# Altium PCB PCB1.PcbDoc
Units mil, origin at the board's own origin, x right, y up, seen from the top; angles counter-clockwise.
Board outline 3670 x 4430 mil, 2 copper layers (Top Layer, Bottom Layer); 37 components, 41 nets, 180 pads, 33 vias.
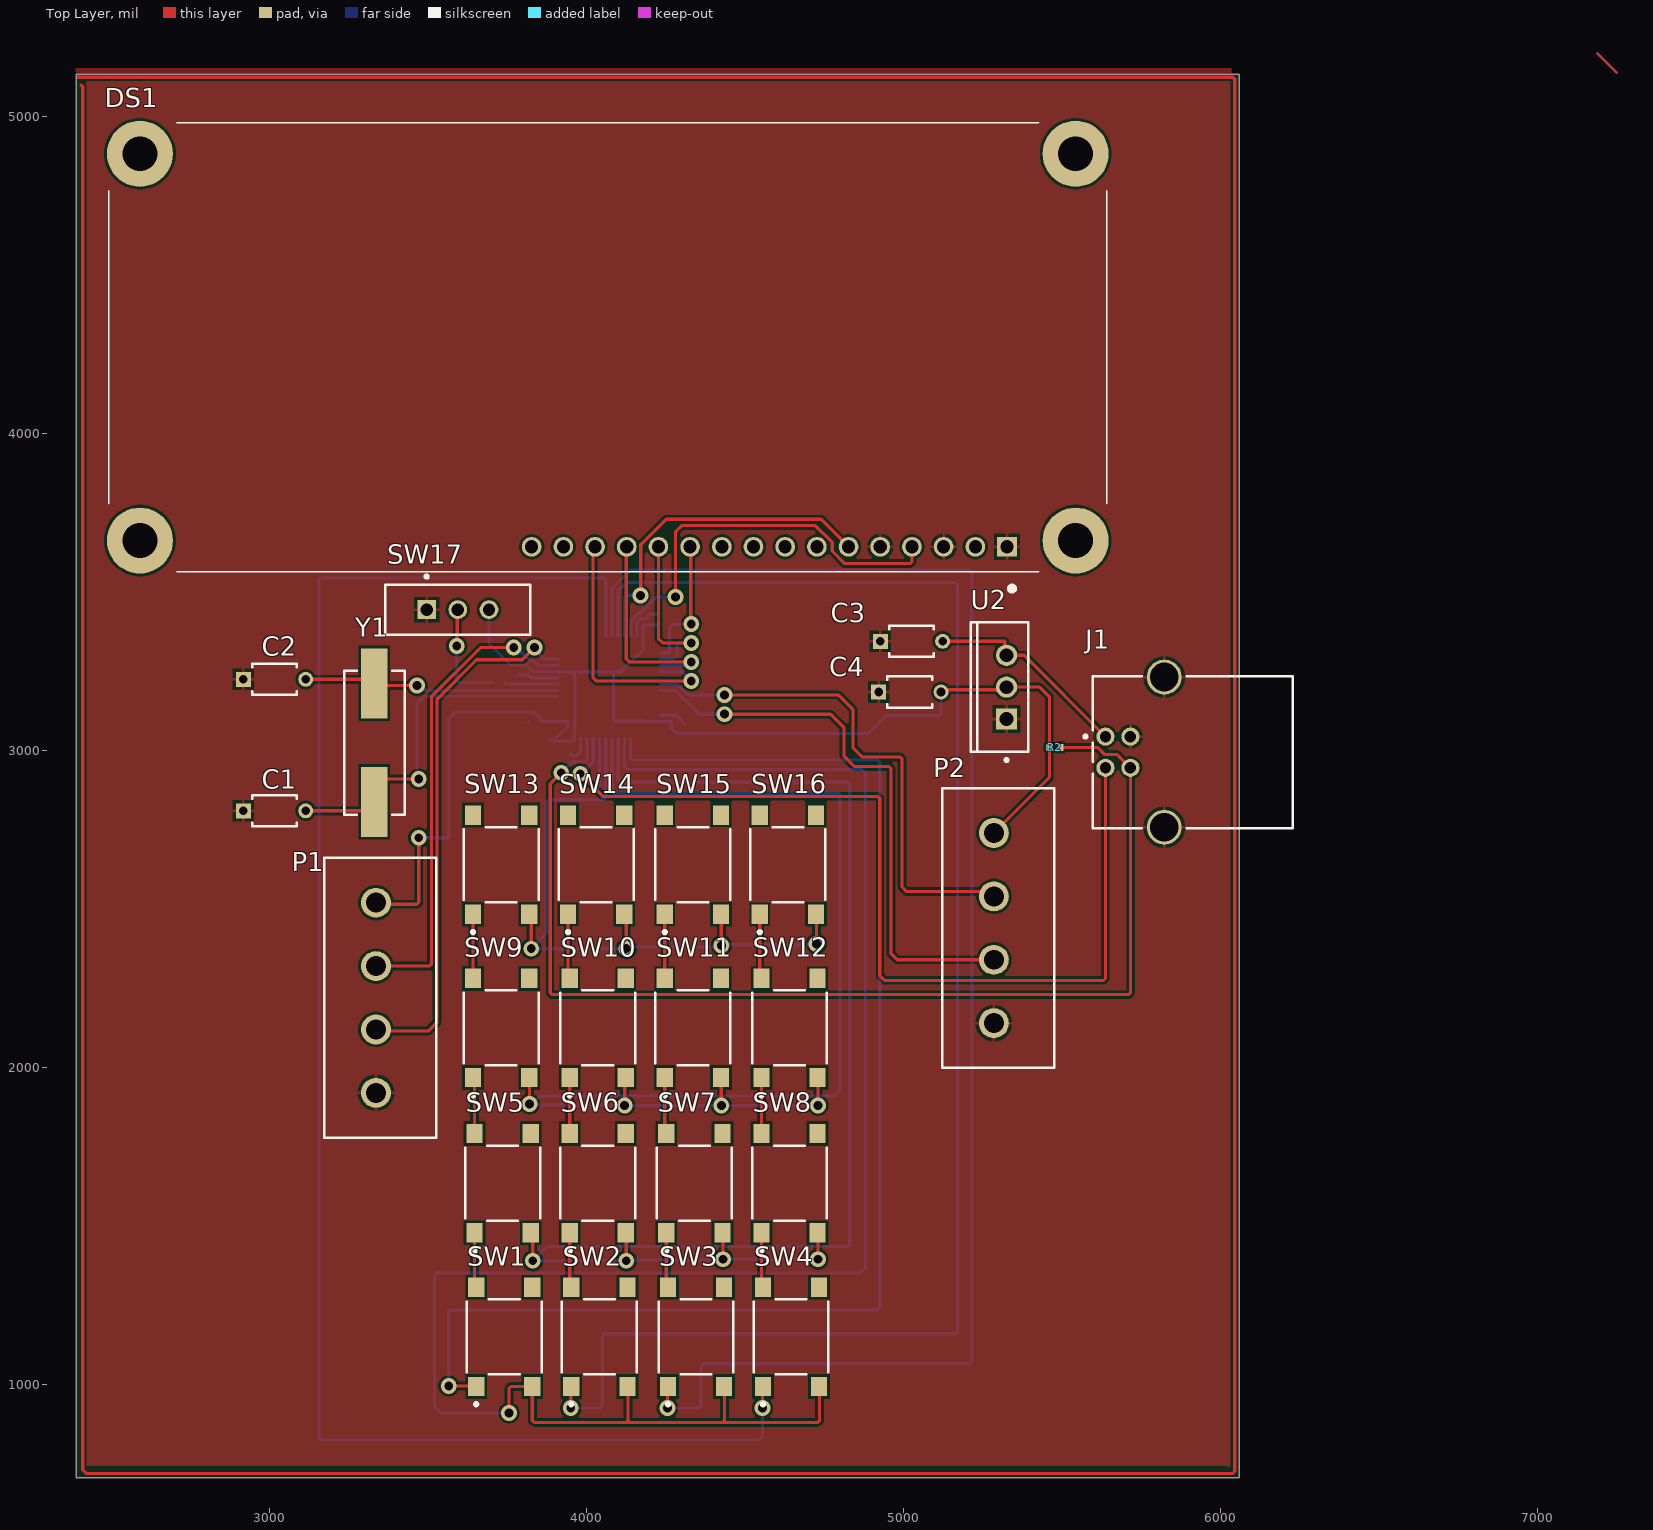
[diagram p0: Top Layer view]
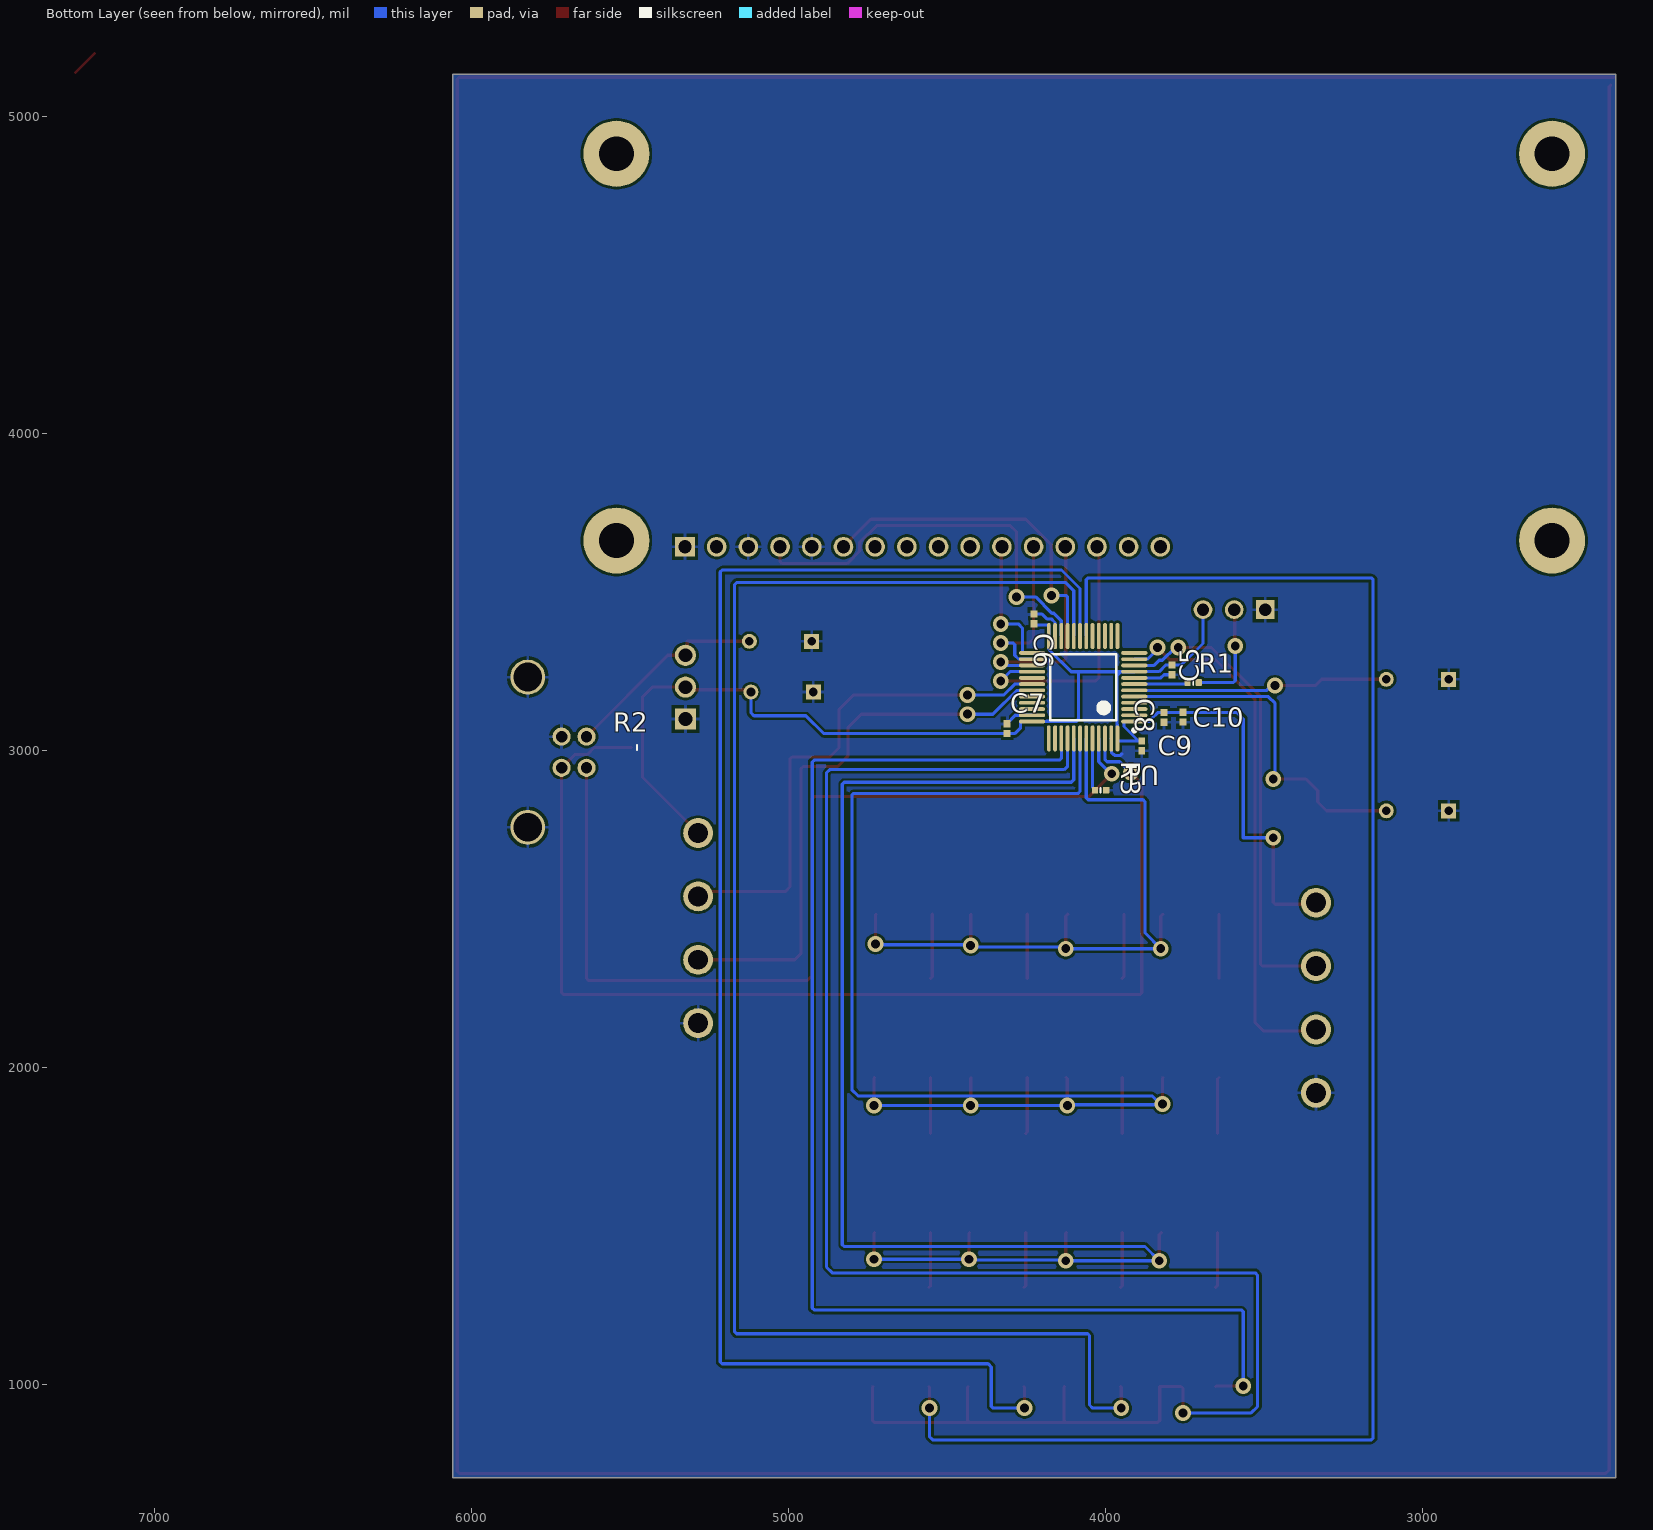
[diagram p1: Bottom Layer view, seen from below]
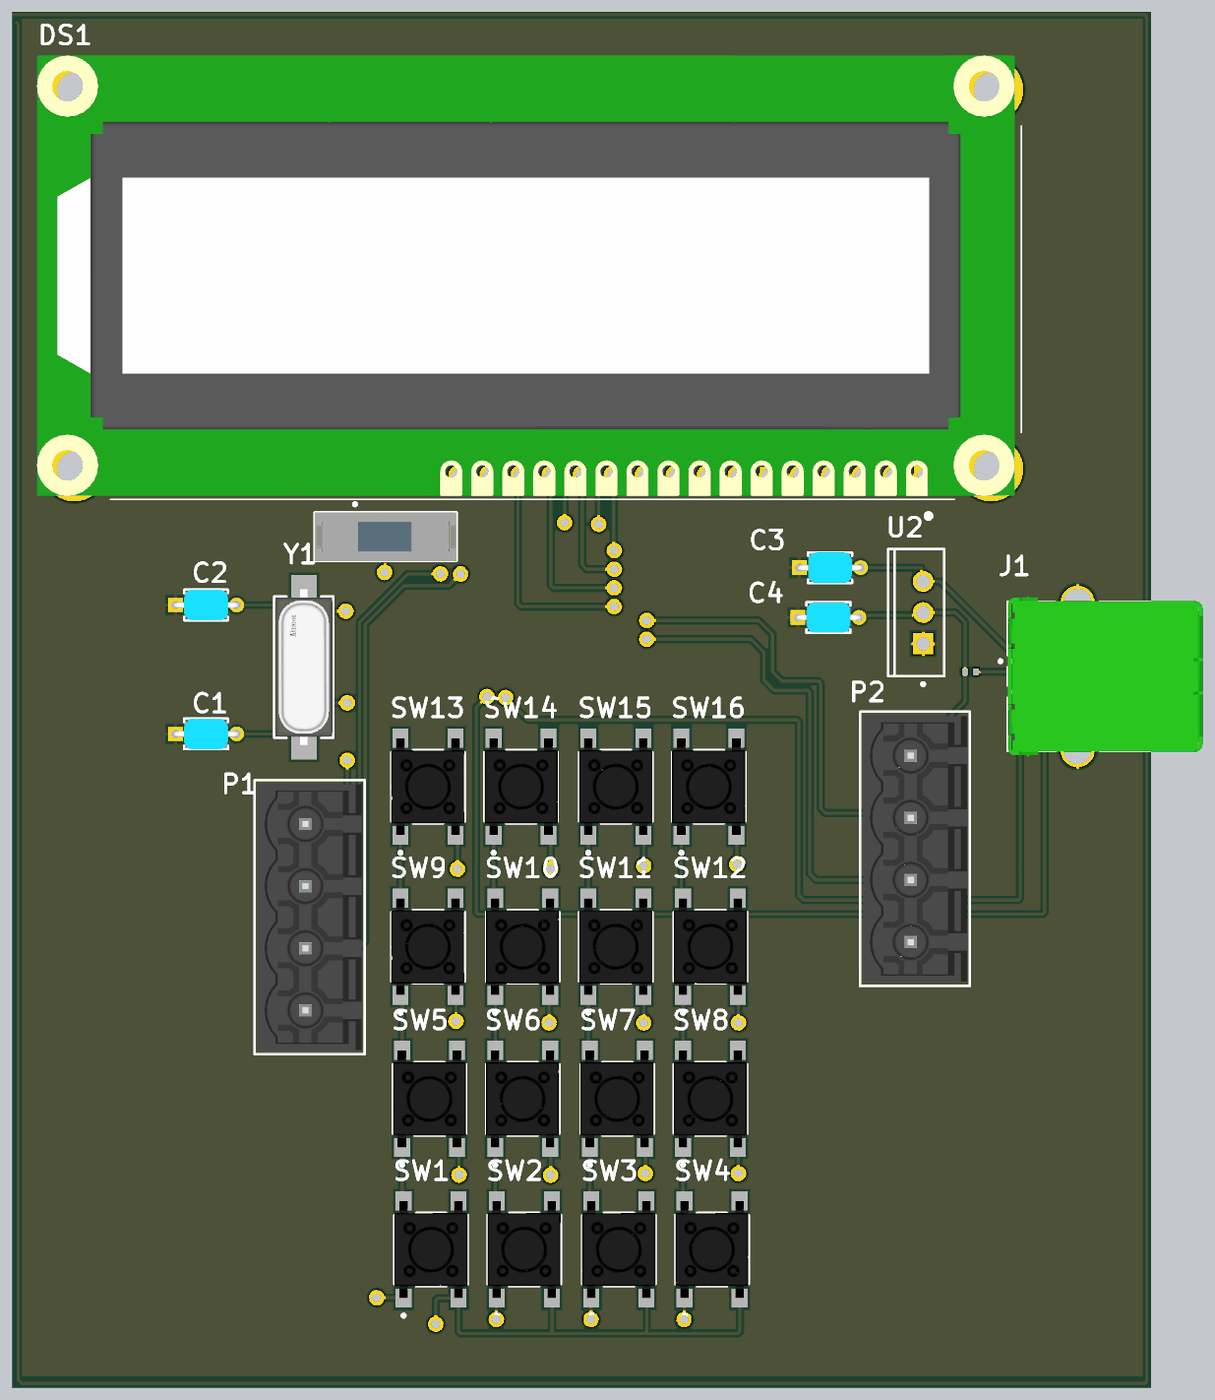
[diagram p2: 3D render of the assembled board from above, using the file's embedded part models]
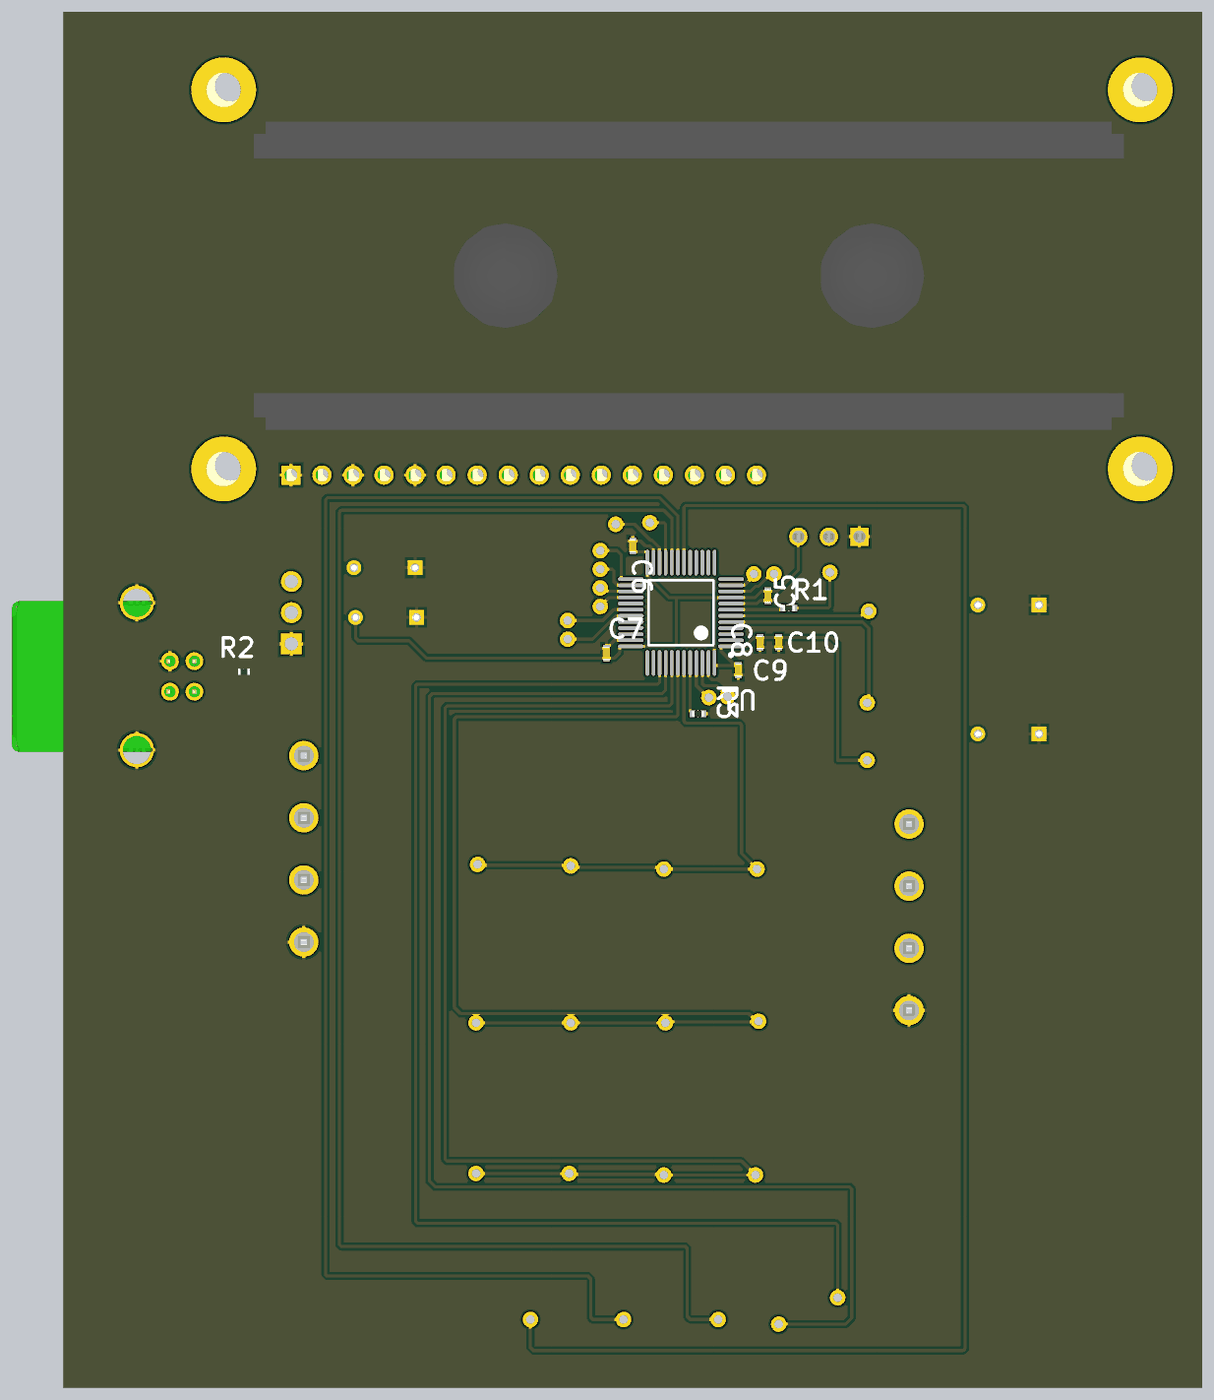
[diagram p3: 3D render of the assembled board from below, using the file's embedded part models]

## Layer stack, top to bottom
Top Solder: solder mask 0.4, Solder Resist, Dk 3.5
Top Layer: signal copper 1.4
Dielectric 1: dielectric 12.6, FR-4, Dk 4.8
Bottom Layer: signal copper 1.4
Bottom Solder: solder mask 0.4, Solder Resist, Dk 3.5

## Board outline
2390,705 6060,705 6060,5135 2390,5135

## Design rules (kind name [scope] priority, off if disabled: settings)
Clearance [All] p1: gap=8 ignorepadtopadclearanceinfootprint=TRUE
ComponentClearance [All] p1: gap=9.84 collisioncheckmode=3 verticalgap=9.84 showdistances=FALSE
PolygonConnect [All] p1: connectstyle=Relief reliefconductorwidth=10 reliefentries=4 polygonreliefangle="90 Angle" airgapwidth=10
RoutingVias [All] p1: holewidth=11.81 width=23.62 viastyle="Through Hole" minholewidth=11.81 minwidth=23.62 maxholewidth=11.81 maxwidth=23.62
SilkToSolderMaskClearance [IsPad] p1: minsilkscreentomaskgap=5.91 clearancetoexposedcopper=TRUE
SolderMaskExpansion [All] p1: expansion=4 istentingtop=FALSE
SupplyNets "Schematic Supply Nets_1" [InNet('GND')] p1: voltage=0.000
SupplyNets "Schematic Supply Nets_2" [InNet('+5')] p2: voltage=0.000
SupplyNets "Schematic Supply Nets" [InNet('+3.3')] p3: voltage=0.000
Width [InNet('+3.3')] p1: maxlimit=11.81 minlimit=7.87 preferedwidth=9.84
28 further rules are at their usual default settings.

## Components (designator, comment, footprint, x,y, rotation, side; value= is the part's Value field where it differs from the comment)
C1 "22pF" FP-RCE0K1-MFG 3015,2810 r0 top
C2 "22pF" FP-RCE0K1-MFG 3015,3225 r0 top
C3 "22uF" FP-RCE0K1-MFG 5025,3345 r0 top
C4 "22uF" FP-RCE0K1-MFG 5020,3185 r0 top
C5 "Capacitor 0.1 uF +/- 5% 16 V 0402" CAPC1005X56X25LL10T15 3790,3254.65 r90 bottom value=100nF
C6 "Capacitor 0.1 uF +/- 5% 16 V 0402" CAPC1005X56X25LL10T15 4225,3415.35 r270 bottom value=100nF
C7 "Capacitor 0.1 uF +/- 5% 16 V 0402" CAPC1005X56X25LL10T15 4310,3069.65 r90 bottom value=100nF
C8 "Capacitor 0.1 uF +/- 5% 16 V 0402" CAPC1005X56X25LL10T15 3885,3015 r90 bottom value=100nF
C9 "Capacitor 0.1 uF +/- 5% 16 V 0402" CAPC1005X56X25LL10T15 3815,3104.65 r90 bottom value=100nF
C10 "Capacitor 0.1 uF +/- 5% 16 V 0402" CAPC1005X56X25LL10T15 3755,3105.35 r90 bottom value=1uF
DS1 "NHD-14432WG-BTFH-V#T" LCD_NHD-14432WG-BTFH-V#T 4045,4285 r180 top
J1 "61729-1011BLF" FCI-61729-1011BLF_V 5730,2995 r90 top
P1 "691701510004B" 691701510004B 3348.78,2220 r270 top
P2 "691701510004B" 691701510004B 5298.78,2440 r270 top
R1 "Resistor 1K +/-5 % 0402 63 mW" RESC0402(1005)_L#1 3722.72,3215 r0 bottom value=10k
R2 "Resistor 1K +/-5 % 0402 63 mW" RESC0402(1005)_L#2 5477.72,3010 r180 bottom value=1k5
R3 "Resistor 1K +/-5 % 0402 63 mW" RESC0402(1005)_L#1 4015,2875 r0 bottom value=10k
SW1 "PTS645SM43SMTR92LFS" FP-PTS645SM43SMTR92LFS-MFG 3740,1150 r90 top
SW2 "PTS645SM43SMTR92LFS" FP-PTS645SM43SMTR92LFS-MFG 4040,1150 r90 top
SW3 "PTS645SM43SMTR92LFS" FP-PTS645SM43SMTR92LFS-MFG 4345,1150 r90 top
SW4 "PTS645SM43SMTR92LFS" FP-PTS645SM43SMTR92LFS-MFG 4645,1150 r90 top
SW5 "PTS645SM43SMTR92LFS" FP-PTS645SM43SMTR92LFS-MFG 3735,1635 r90 top
SW6 "PTS645SM43SMTR92LFS" FP-PTS645SM43SMTR92LFS-MFG 4035,1635 r90 top
SW7 "PTS645SM43SMTR92LFS" FP-PTS645SM43SMTR92LFS-MFG 4340,1635 r90 top
SW8 "PTS645SM43SMTR92LFS" FP-PTS645SM43SMTR92LFS-MFG 4640,1635 r90 top
SW9 "PTS645SM43SMTR92LFS" FP-PTS645SM43SMTR92LFS-MFG 3730,2125 r90 top
SW10 "PTS645SM43SMTR92LFS" FP-PTS645SM43SMTR92LFS-MFG 4035,2125 r90 top
SW11 "PTS645SM43SMTR92LFS" FP-PTS645SM43SMTR92LFS-MFG 4335,2125 r90 top
SW12 "PTS645SM43SMTR92LFS" FP-PTS645SM43SMTR92LFS-MFG 4640,2125 r90 top
SW13 "PTS645SM43SMTR92LFS" FP-PTS645SM43SMTR92LFS-MFG 3730,2640 r90 top
SW14 "PTS645SM43SMTR92LFS" FP-PTS645SM43SMTR92LFS-MFG 4030,2640 r90 top
SW15 "PTS645SM43SMTR92LFS" FP-PTS645SM43SMTR92LFS-MFG 4335,2640 r90 top
SW16 "PTS645SM43SMTR92LFS" FP-PTS645SM43SMTR92LFS-MFG 4635,2640 r90 top
SW17 "EG1218" ESWI-EG1218_V 3593.43,3445 r0 top
U1 "STM32F103C8T6" STM-LQFP48_M 4070,3200 r0 bottom
U2 "LD1117V33" STM-TO220-3 5325,3200.39 r180 top
Y1 "ABLS-8.000MHZ-B2-T" FP-ABLS-MFG 3330,3025 r90 top

## Footprints (in the part's own frame and the unit in brackets; to place one, negate y for a bottom-side part, rotate by r counter-clockwise, add the part's x,y. Pads: shape width x height; smd on the part's side, far side on the other; paste and mask are expansions set on the pad)
691701510004B [mm] "THR - 5,08mm - PCB Vertical Close - 04p"
  round 2.4 hole 1.6: 1(-7.62,-0.35) 2(-2.54,-0.35) 3(2.54,-0.35) 4(7.62,-0.35)
  silkscreen extent -11.21,-4.5 11.21,4.5, body extent -10.86,-4.25 10.86,4.25, height 12.1
CAPC1005X56X25LL10T15 [mm] "Chip Capacitor, 2-Leads, Body 1.10x0.60mm, IPC High Density"
  rect 0.58x0.54 smd: 1(-0.39,0) 2(0.39,0)
  body extent -0.55,-0.3 0.55,0.3, height 0.56
ESWI-EG1218_V [mm] "THD, 3-Leads, Body 11.6x4mm, Pitch 2.5mm"
  rect 1.5x1.5 hole 1: 1(-2.5,0)
  round 1.5 hole 1: 2(0,0) 3(2.5,0)
  silkscreen extent -5.8,-2 5.8,2.77, body extent -5.8,-2 5.8,2, height 7.4
FCI-61729-1011BLF_V [mm] "THD, 4-Leads, Body 16x12.2mm"
  round 1.45 hole 0.92: 1(1.25,2.355) 2(-1.25,2.355) 3(-1.25,0.355) 4(1.25,0.355)
  round 2.8 hole 2.3: 5(6.02,-2.355) 6(-6.02,-2.355)
  silkscreen extent -6.1,-12.63 6.1,4.09, body extent -6.56,-12.58 6.56,3.37, height 11
FP-ABLS-MFG [mm]
  rect 5.6x2.1 smd paste+0 mask+0: 1(-4.75,0) 2(4.75,0)
  silkscreen extent -5.77,-2.42 5.77,2.42, body extent -6.35,-2.35 6.35,2.35, height 4.3
FP-PTS645SM43SMTR92LFS-MFG [mm]
  rect 1.55x1.3 smd paste+0 mask+0: 1(-3.975,2.25) 2(3.975,2.25) 3(-3.975,-2.25) 4(3.975,-2.25)
  silkscreen extent -5.52,-3 3,3, body extent -4.85,-3.1 4.85,3.1, height 0.25
FP-RCE0K1-MFG [mm]
  rect 1.2x1.2 hole 0.7 paste-2539.97 mask+0: 1(-2.5,0)
  round 1.2 hole 0.7 paste-2539.97 mask+0: 2(2.5,0)
  silkscreen extent -1.8,-1.25 1.8,1.25, body extent -2.75,-1.25 2.75,1.25, height 6
LCD_NHD-14432WG-BTFH-V#T [mm]
  rect 1.575x1.575 / inner round 1.575 / far side rect 1.575x1.575 hole 1.05: 1(-32.55,16.3)
  round 1.575 hole 1.05: 2(-30.01,16.3) 3(-27.47,16.3) 4(-24.93,16.3) 5(-22.39,16.3) 6(-19.85,16.3) 7(-17.31,16.3) 8(-14.77,16.3) 9(-12.23,16.3) 10(-9.69,16.3) 11(-7.15,16.3) 12(-4.61,16.3) 13(-2.07,16.3) 14(0.47,16.3) 15(3.01,16.3) 16(5.55,16.3)
  round 5.3 hole 2.8: S1(-38.05,15.8) S2(-38.05,-15.2) S3(36.95,15.8) S4(36.95,-15.2)
  silkscreen extent -40.55,-17.7 39.45,19.85, body extent -40,-18 40,18, height 10.2
RESC0402(1005)_L#1 [mm] "Chip Resistor, Body 1.0x0.5mm, IPC High Density"
  rrect25% 0.5x0.55 smd: 1(-0.45,0) 2(0.45,0)
  silkscreen extent 0,-0.2 0,0.2, body extent -0.5,-0.25 0.5,0.25, height 0.3
RESC0402(1005)_L#2 [mm] "Chip Resistor, Body 1.0x0.5mm, IPC High Density"
  rrect25% 0.5x0.55 smd far side: 1(-0.45,0) 2(0.45,0)
  silkscreen extent 0,-0.2 0,0.2, body extent -0.5,-0.25 0.5,0.25, height 0.3
STM-LQFP48_M [mm] "QFP, 48-Leads, Body 7x7mm, Pitch 0.5mm, IPC Low Density"
  oval 2.1x0.3 smd: 1(-4.1,2.75) 2(-4.1,2.25) 3(-4.1,1.75) 4(-4.1,1.25) 5(-4.1,0.75) 6(-4.1,0.25) 7(-4.1,-0.25) 8(-4.1,-0.75) 9(-4.1,-1.25) 10(-4.1,-1.75) 11(-4.1,-2.25) 12(-4.1,-2.75) 25(4.1,-2.75) 26(4.1,-2.25) 27(4.1,-1.75) 28(4.1,-1.25) 29(4.1,-0.75) 30(4.1,-0.25) 31(4.1,0.25) 32(4.1,0.75) 33(4.1,1.25) 34(4.1,1.75) 35(4.1,2.25) 36(4.1,2.75)
  oval 0.3x2.1 smd: 13(-2.75,-4.1) 14(-2.25,-4.1) 15(-1.75,-4.1) 16(-1.25,-4.1) 17(-0.75,-4.1) 18(-0.25,-4.1) 19(0.25,-4.1) 20(0.75,-4.1) 21(1.25,-4.1) 22(1.75,-4.1) 23(2.25,-4.1) 24(2.75,-4.1) 37(2.75,4.1) 38(2.25,4.1) 39(1.75,4.1) 40(1.25,4.1) 41(0.75,4.1) 42(0.25,4.1) 43(-0.25,4.1) 44(-0.75,4.1) 45(-1.25,4.1) 46(-1.75,4.1) 47(-2.25,4.1) 48(-2.75,4.1)
  silkscreen extent -4.22,-2.65 2.65,3.57, body extent -3.5,-3.5 3.5,3.5, height 1.6
STM-TO220-3 [mm] "FM, 3-Leads, Body 10.4x4.6mm, Pitch 2.55mm"
  rect 1.7x1.7 hole 1.1: 1(0,2.55)
  round 1.7 hole 1.1: 2(0,0) 3(0,-2.55)
  silkscreen extent -1.74,-5.2 2.86,5.97, body extent -1.74,-5.2 2.86,5.2, height 19.68

## Part data
C1 C2: library part CMP-06035-047580-1, "Cap Ceramic 22pF 50V C0G ±5% Radial 5mm +125°C Automotive Bulk", Case/Package=Radial, Dielectric=C0G, Max Operating Temperature=125°C, Min Operating Temperature=-55°C, Package Quantity=500, Ratings=AEC-Q200, Resistor Type=Ceramic, Tolerance=5%, Voltage Rating=50V, Capacitance=22pF, Height=3.5mm, Height - Seated (Max)=0.138inch, Lead Diameter=0.5mm, Lead Pitch=0.197inch, Lead/Base Style="Formed Leads", Length=0.142inch, Mount="Through Hole", Packaging=Bulk, Termination=Radial, Voltage Rating (DC)=50V, Width=0.098inch
C3 C4: library part CMP-06035-047580-1, "Cap Ceramic 22pF 50V C0G ±5% Radial 5mm +125°C Automotive Bulk", Capacitance=22pF, Case/Package=Radial, Dielectric=C0G, Max Operating Temperature=125°C, Min Operating Temperature=-55°C, Package Quantity=500, Ratings=AEC-Q200, Resistor Type=Ceramic, Tolerance=5%, Voltage Rating=50V, Height=3.5mm, Height - Seated (Max)=0.138inch, Lead Diameter=0.5mm, Lead Pitch=0.197inch, Lead/Base Style="Formed Leads", Length=0.142inch, Mount="Through Hole", Packaging=Bulk, Termination=Radial, Voltage Rating (DC)=50V, Width=0.098inch
C5 C6 C7 C8 C9 C10: library part CMP-001-00001-6, "Chip Capacitor, 0.1 uF, +/- 5%, 16 V, 0402 (1005 Metric)", Capacitor Type=Ceramic, Case/Package=0402, Max Operating Temperature=125°C, Min Operating Temperature=-55°C, Tolerance=5%, Voltage Rating=16V, Mounting Technology=SM, Pins=2, RoHS Compliant=True
DS1: library part CMP-007-00039-1, "- Graphic LCD Display Module Transflective Black (White - Inverted) FSTN - Film Super-Twisted Nematic Parallel, 8-Bit - 144 x 32", Case/Package=None, Availability="In Stock", Check_prices=https://www.snapeda.com/parts/NHD-14432WG-BTFH-V%23T/Newhaven+Display+Intl/view-part/?ref=eda, Component Type=Standard, Design Item ID=NHD-14432WG-BTFH-V#T, MF="Newhaven Display", MP=NHD-14432WG-BTFH-V#T, Pins=20, Price=None, Purchase-URL=https://pricing.snapeda.com/search/part/NHD-14432WG-BTFH-V#T/?ref=eda, SnapEDA_Link=https://www.snapeda.com/parts/NHD-14432WG-BTFH-V%23T/Newhaven+Display+Intl/view-part/?ref=snap, Source=NHD-14432WG-BTFH-V#T.SchLib
J1: library part CMP-002-00041-2, "USB Receptacle B Type, Right Angle, 4 Position, Height 11.5 mm,-40 to 85 degC, RoHS, Tube", Colour=Black, Current Rating=1.5A, Manufacturer="FCI Electronics", Max Operating Temperature=40°C, Min Operating Temperature=0°C, Package Description="4-Pin Through Hole Device, Body 16 x 12.2 mm", Package Quantity=44, Case/Package=61729-1011BLF, Connector Type=USB, Contact Material=Copper, Contact Plating=Nickel, Datasheet URL=http://portal.fciconnect.com/Comergent/fci/drawing/61729.pdf, Datasheet Version="Rev. W, 05/2014", Gender=Female, Lead Pitch=2.5mm, Manufacturer URL=http://portal.fciconnect.com/, Mounting Technology=TH, Package Reference=61729-1011BLF, Packaging=Rail/Tube, Pins=4, RoHS Compliant=True
P1 P2: library part CMP-1502-02331-3, "Terminal Block, 5.08MM, Close Vertical Pcb Header, Thr Type, 4 Pins", Color=Black, Current Rating=10A, Max Operating Temperature=105°C, Min Operating Temperature=-40°C, Voltage Rating=300V, Connector Type="Terminal Block", Contact Material=Brass, Contact Plating=Tin, Gender=Male, Housing Material=Polymer, Lead Pitch=5.08mm, Length=23.12mm, Mount="Through Hole", Number of Contacts=4, Number of Pins=4, Pitch=5.08mm, REACH SVHC=Unknown, RoHS=Compliant, Termination=PCB
R1 R2 R3: library part CMP-009-00157-3, "Chip Resistor, 1 kOhms, +/-5 %, 63 mW, -55 to 155 degC, 0402", Case/Package=0402, Max Operating Temperature=155°C, Min Operating Temperature=-55°C, Power=63mW, Tolerance=5%, Pins=2
SW1 SW2 SW3 SW4 SW5 SW6 SW7 SW8 SW9 SW10 SW11 SW12 SW13 SW14 SW15 SW16: library part CMP-2000-05160-2, "SWITCH TACTILE SPST-NO 0.05A 12V", Case/Package=SMD/SMT, Color=Black, Contact Resistance=100mR, Current Rating=50mA, Max Operating Temperature=60°C, Max Voltage Rating (DC)=12V, Min Operating Temperature=-20°C, Operating Force=160gf, Package Quantity=1, Actuator Length=0.85mm, Actuator Material=Nylon, Actuator Type=Standard, Contact Material=Silver, Contact Plating=Silver, Depth=9mm, Illumination Type=Non-Illuminated, Lead Free="Lead Free", Length=6mm, Max Current Rating=50mA, Mechanical Life=100000Cycles, Mount="Surface Mount", Orientation=Straight, Packaging="Tape and Reel", REACH SVHC="No SVHC", Switch Function=Off-Mom, Termination="Gull Wing", Throw Configuration=SPST, Voltage Rating (DC)=12V
SW17: library part CMP-011-00006-2, "Slide Switch, SPDT, 500 V, -20 to 70 degC, 3-Pin THD, RoHS, Bulk", Contact Current Rating=200mA, Manufacturer=E-Switch, Max Operating Temperature=70°C, Min Operating Temperature=-20°C, Operating Force=250gf, Package Description="3-Pin Through Hole Device, Body 11.6 x 4 mm, Pitch 2.5 mm", Package Quantity=1000, Voltage Rating (AC)=30V, Case/Package=EG1218, Contact Finish=Silver, Contact Material=Copper, Contact Plating=Silver, Current Rating=200mA, Datasheet URL=https://www.e-switch.com/system/asset/product_line/data_sheet/119/EG.pdf, Datasheet Version=Oct-15, Manufacturer URL=http://www.e-switch.ch/en/, Mounting Technology=TH, Package Reference=EG1218, Packaging=Bulk, Pins=3, RoHS Compliant=True, Throw Configuration=SPDT, Voltage Rating (DC)=30V
U1: library part CMP-00001-1, "MCU 32-bit STM32F1 ARM Cortex M3 RISC 64KB Flash 2.5V/3.3V 48-Pin LQFP Tray", Case/Package=LQFP, Clock Frequency=16MHz, Frequency=72MHz, Manufacturer Package Identifier=ai14911d, Max Operating Temperature=85°C, Max Power Dissipation=363mW, Max Supply Current=50mA, Max Supply Voltage=3.6V, Min Operating Temperature=-40°C, Min Supply Voltage=2V, Nominal Supply Current=1.7µA, Operating Supply Voltage=3.3V, Temperature Grade=Industrial, ADC Channels (Resolution)="10-Ch 12-Bit", Address Bus Width=32b, China RoHS=Compliant, Core Architecture=ARM, Country of Origin=Malaysia, Data Bus Width=32b, Density=512kb, EEPROM Memory Size=0B, Export Control Classification Number (ECCN) Code=3A991.A.2, Flash Memory Size=64kB, Harmonized Tariff Schedule (HTS) Code=8542.31.00.25, Height=1.45mm, Height - Seated (Max)=1.6mm, Interface="CAN, USB", Introduction Date=2007-06-07, Lead Free="Lead Free", Length=7mm, Lifecycle Status=Production, Memory Format=FLASH, Memory Size=64kB, Mounting Technology="Surface Mount", Number of A/D Converters=2, Number of ADC Channels=10, Number of Bits=32, Number of Channels=10, Number of I2C Channels=2, Number of I/Os=37, Number of Interrupts=16, Number of Programmable I/O=48, Number of PWM Channels=1, Number of SPI Channels=2, Number of Terminals=48, Number of Timers/Counters=4, Number of USART Channels=3, Oscillator Type=Internal, Peripherals=POR, Pins=48, Radiation Hardening=No, RAM Size=20kB, REACH SVHC=Yes, RoHS=Compliant, Schedule B=8542310000, Terminal Pitch=500µm, Termination=SMD/SMT, Watchdog Timer=Yes, Width=7mm
U2: library part CMP-019-00020-3, "Low Drop Positive Voltage Regulator, 800 mA, Fixed 3.3 V Output, 0 to 125 degC, 3-Pin TO-220, RoHS, Tube", Case/Package=TO-220-3, Dropout Voltage=1.1V, Manufacturer=STMicroelectronics, Max Input Voltage=15V, Max Operating Temperature=125°C, Max Ouput Current=800mA, Min Input Voltage=4.4V, Min Operating Temperature=0°C, Min Supply Voltage=4.75V, Nominal Output Voltage=3.3V, Output Current=1.3A, Package Quantity=50, Power=12W, Datasheet URL=http://www.farnell.com/datasheets/1776449.pdf, Datasheet Version="Rev. A, 07/2003", Manufacturer URL=http://www.st.com/, Max Supply Voltage=15V, Output Voltage=3.3V, Outputs=1, Packaging=Rail/Tube, Pins=3, RoHS Compliant=True
Y1: library part CMP-27762-009874-1, "CRYSTAL 8.0000MHZ 18PF SMD", Case/Package=SMD/SMT, ESR (Equivalent Series Resistance)=80R, Frequency=8MHz, Frequency Stability=50ppm, Frequency Tolerance=20ppm, Load Capacitance=18pF, Max Operating Temperature=70°C, Min Operating Temperature=-20°C, Operating Frequency="8 MHz", Package Quantity=1000, Accuracy=20ppm, Contact Plating=Tin, Depth=4.7mm, Height=0.165inch, Lead Free="Lead Free", Length=11.4mm, Mount="Surface Mount", Number of Pins=2, Packaging="Tape and Reel", Radiation Hardening=No, REACH SVHC="No SVHC", Series=ABLS, Series Resistance=80R, Termination=SMD/SMT, Tolerance=20ppm, Width=4.7mm

## Via types
v1: diameter 50, hole 28, Top Layer to Bottom Layer, 33 vias

## Nets (pads, with @x,y where several pads share a name; then routed paths per layer and width w, separated by ;. In a path a pad name is that pad's centre, name@x,y a point inside that pad or via, vN(x,y) a via of type N, cw(c..) or ccw(c..) an arc to the next point about the centre after c; other vN are vias at no path point)
+3.3: C4.2 C5.2 C6.2 C7.1 C8.2 C9.2 C10.2 P1.1 P2.1 R2.2 SW17.3 U1.1 U1.9 U1.24 U1.36 U1.48 U2.2 | length 4538.1
  Top Layer w9.84: P1.1 3340,2515 3464.23,2515 3470,2520.77 v1(3470,2725) ; C4.2 5125.58,3192.16 5316.76,3192.16 U2.2 5429.61,3200.39 5460,3170 R2.2 5460,2915 P2.1
  Bottom Layer w9.84: v1(3470,2725) 3565,2725 3565,3100 3585.71,3120.71 C10.2 3755.35,3120.35 3814.65,3120.35 C9.2 3835,3120 3855,3100 3855,3095.77 3858.66,3092.11 3908.21,3092.11 U1.1 3940.04,3091.73 3940.95,3090.82 3940.95,3075.9 C8.2@3895.41,3030.35 ; SW17.3 3691.85,3338.15 3760,3270 C5.2 3809.66,3270 3830.44,3249.21 U1.9 3908.96,3248.84 3951.33,3248.84 ; C8.2 C8.2@3895.41,3030.35 ; U1.48@3961.73,3031.26 3960.82,3030.35 C8.2@3895.41,3030.35 ; U1.48 3962.11,3038.96 3962.11,3075.78 3962.59,3076.27 3962.59,3081.81 3962.84,3082.07 3962.84,3237.33 3951.33,3248.84 ; U1.24 4177.89,3361.04 4177.89,3318.67 4108.06,3248.84 4085,3248.84 ; C4.2 5118.42,3119.19 5109.23,3110 4945,3110 4889.29,3054.29 C7.1 4284.61,3054.29 4267.23,3071.67 4267.23,3090.82 4266.32,3091.73 U1.36 4231.04,3092.11 4186.8,3092.11 4186.07,3092.84 4090.77,3092.84 4085,3098.61 4085,3248.84 ; 3951.33,3248.84 4085,3248.84
  Bottom Layer w10: U1.24 4178.27,3395.09 4179.1,3395.93 4220.93,3395.93 C6.2
+5: DS1.2
BOOT0: R3.2 U1.44 | length 166.8
  Bottom Layer w10: R3.2 4032.72,2875.98 4040.47,2883.74 U1.44
C1: SW4.1 U1.18 | length 5361.6
  Top Layer w10: v1(4555,925) 4555,992.09 SW4.1
  Bottom Layer w10: U1.18 4060.16,3538.98 4054.14,3545 3160.86,3545 3155,3539.14 3155,830.86 3160.86,825 4545,825 4555,835 v1(4555,925)
C2: SW3.1 U1.19 | length 4967.4
  Top Layer w10: v1(4255,925) 4255,992.09 SW3.1
  Bottom Layer w10: U1.19 4079.84,3511.56 4138.28,3570 5209.14,3570 5215,3564.14 5215,1070.86 5209.14,1065 4370,1065 4360,1055 4360,930.86 4354.14,925 v1(4255,925)
C3: SW2.1 U1.20 | length 5102.1
  Top Layer w10: v1(3950,925) 3950,992.09 SW2.1
  Bottom Layer w10: v1(3950,925) 4040,925 4050,935 4050,1154.14 4055.86,1160 5164.14,1160 5170,1165.86 5170,3524.14 5164.14,3530 4125,3530 4099.53,3504.53 U1.20
C4: SW1.1 U1.39 | length 4263
  Top Layer w10: v1(3565,995) 3649.92,995 SW1.1
  Bottom Layer w10: v1(3565,995) 3565,1229.14 3570.86,1235 4919.14,1235 4925,1240.86 4925,2964.14 4919.14,2970 4144.76,2970 4138.9,2975.86 U1.39
D4: DS1.11 U1.25 | length 426.8
  Top Layer w10: DS1.11 4328.25,3641.52 4328.25,3401.75 v1(4330,3400)
  Bottom Layer w10: U1.25 4261.01,3308.27 4261.85,3309.1 4261.85,3386.85 4275,3400 v1(4330,3400)
D5: DS1.12 U1.26 | length 538.5
  Top Layer w10: DS1.12 4226.5,3353.5 4240,3340 v1(4330,3340)
  Bottom Layer w10: U1.26 4231.76,3288.93 4274.25,3288.93 4285.76,3300.44 4285.76,3334.14 4291.61,3340 v1(4330,3340)
D6: DS1.13 U1.27 | length 666.2
  Top Layer w10: DS1.13 4125,3641.77 4125,3290 4135,3280 v1(4330,3280)
  Bottom Layer w10: U1.27 4308.07,3268.9 4319.18,3280 v1(4330,3280)
D7: DS1.14 U1.28 | length 840.8
  Top Layer w10: DS1.14 4020,3636.77 4020,3230 4030,3220 v1(4330,3220)
  Bottom Layer w10: U1.28 4300.79,3249.21 v1(4330,3220)
D+: J1.3 R2.1 U1.46 | length 3667.2
  Top Layer w10: v1(3920,2930) 3885,2895 3885,2235.86 3890.86,2230 5710.17,2230 5716.02,2235.86 J1.3 5674.48,2987.33 5635.41,2987.33 5612.75,3010 R2.1
  Bottom Layer w10: v1(3920,2930) 3955,2965 3994.9,2965 4000.76,2970.86 4000.76,3038.24 U1.46
D-: J1.2 U1.45 | length 3052.1
  Top Layer w10: v1(3980,2927) 4052,2855 4919.14,2855 4925,2849.14 4925,2290 4940,2275 5631.43,2275 5637.28,2280.86 J1.2
  Bottom Layer w10: v1(3980,2927) 3982.35,2927 4020.79,2965.43 U1.45
E: DS1.6 U1.21 | length 1060.9
  Top Layer w10: v1(4170,3490) 4170.5,3490.5 4170.5,3649.5 4251,3730 4739.76,3730 DS1.6
  Bottom Layer w10: U1.21 4119.21,3484.14 4125.07,3490 v1(4170,3490)
GND: C1.1 C2.1 C3.1 C4.1 C5.1 C6.1 C7.2 C8.1 C9.1 C10.1 DS1.1 DS1.3 DS1.5 J1.4 J1.5 J1.6 P1.4 P2.4 R3.1 SW17.1 U1.8 U1.23 U1.35 U1.47 U2.1 | length 419.2
  Bottom Layer w9.84: C9.1 C9.1@3817.06,3091.36 ; U1.23 4158.96,3361.79 4158.96,3404.17 4170.47,3415.68 4184.57,3415.68 4199.61,3430.71 C6.1 ; U1.35 4284.37,3111.42 4310,3085.79 C7.2
  Bottom Layer w10: C5.1 3815.02,3239.29 3824.78,3229.53 U1.8 ; 3948.36,2989.78 3953.9,2984.24 3969.56,2984.24 3973.49,2988.17 3975.21,2988.17 3981.07,2994.03 3981.07,3038.24 U1.47
NetR1_1: R1.1 SW17.2 | length 343
  Top Layer w10: v1(3590,3330) 3591.71,3331.71 3591.71,3443.29 SW17.2
  Bottom Layer w10: v1(3590,3330) 3590,3220.86 3595.86,3215 R1.1
NetSW1_2: SW1.2 SW5.1 | length 174.1
  Top Layer w10: SW5.1 3646.42,1311.5 SW1.2
NetSW2_2: SW2.2 SW6.1 | length 174.1
  Top Layer w10: SW6.1 3946.42,1311.5 SW2.2
NetSW3_2: SW3.2 SW7.1 | length 174.1
  Top Layer w10: SW7.1 4251.42,1311.5 SW3.2
NetSW4_2: SW4.2 SW8.1 | length 174.1
  Top Layer w10: SW8.1 4551.42,1311.5 SW4.2
NetSW5_2: SW5.2 SW9.1 | length 179.1
  Top Layer w10: SW9.1 3646.42,1963.5 SW5.2
NetSW6_2: SW6.2 SW10.1 | length 177
  Top Layer w10: SW6.2 SW10.1
NetSW7_2: SW7.2 SW11.1 | length 179.1
  Top Layer w10: SW11.1 4246.42,1796.5 SW7.2
NetSW8_2: SW8.2 SW12.1 | length 177
  Top Layer w10: SW8.2 SW12.1
NetSW9_2: SW9.2 SW13.1 | length 202
  Top Layer w10: SW9.2 SW13.1
NetSW10_2: SW10.2 SW14.1 | length 204.1
  Top Layer w10: SW14.1 3941.42,2286.5 SW10.2
NetSW11_2: SW11.2 SW15.1 | length 202
  Top Layer w10: SW11.2 SW15.1
NetSW12_2: SW12.2 SW16.1 | length 204.1
  Top Layer w10: SW16.1 4546.42,2286.5 SW12.2
NRST: R1.2 U1.7 | length 170.5
  Bottom Layer w10: R1.2 3740.43,3214.68 3745.28,3209.84 U1.7
OSC_IN: C1.2 U1.5 Y1.1 | length 1113.7
  Top Layer w10: C1.2 3302.01,2810 Y1.1 3330,2873.66 3366.34,2910 v1(3470,2910)
  Bottom Layer w10: v1(3470,2910) 3464.14,2915.86 3464.14,3149.14 3485.47,3170.47 U1.5
OSC_OUT: C2.2 U1.6 Y1.2 | length 809.6
  Top Layer w10: C2.2 3317.01,3225 Y1.2 3337.01,3205 v1(3465,3205)
  Bottom Layer w10: v1(3465,3205) 3475.82,3205 3490.67,3190.16 U1.6
R1: SW1.3 SW2.3 SW3.3 SW4.3 U1.40 | length 5959.7
  Top Layer w10: v1(3755,910) 3755,987.65 3760.86,993.5 SW1.3 3828.58,885.86 3834.44,880 4124.14,880 ; SW2.3 4130,992.09 4130,885.86 4124.14,880 ; SW3.3 4435,992.09 4435,885.86 4429.14,880 ; SW4.3 4735,992.09 4735,885.86 4729.14,880 4429.14,880 ; 4124.14,880 4429.14,880
  Bottom Layer w10: v1(3755,910) 3540,910 3520,930 3520,1345 3527,1352 4862,1352 4880,1370 4880,2930 4870,2940 4130,2940 4119.21,2950.79 U1.40
R2: SW5.3 SW6.3 SW7.3 SW8.3 U1.41 | length 4591.5
  Top Layer w10: SW5.3 3830,1472.09 v1(3830,1390) ; SW6.3 4125,1477.09 v1(4125,1390) ; SW7.3 4430,1477.09 v1(4430,1395) ; SW8.3 4730,1477.09 v1(4730,1395)
  Bottom Layer w10: U1.41 4099.53,2908.31 4107.84,2900 4824.14,2900 4830,2894.14 4830,1440.86 4824.14,1435 3875,1435 v1(3830,1390) v1(4125,1390) 4127.5,1392.5 4427.5,1392.5 v1(4430,1395) v1(4730,1395)
R3: SW9.3 SW10.3 SW11.3 SW12.3 U1.42 | length 4084.8
  Top Layer w10: SW9.3 3820,1967.09 v1(3820,1885) ; v1(4120,1880) 4120,1964.92 SW10.3 ; SW11.3 4425,1967.09 v1(4425,1880) ; SW12.3 4730,1967.09 v1(4730,1880)
  Bottom Layer w10: U1.42 4079.84,2870.86 4085.7,2865 4794.14,2865 4800,2859.14 4800,1930 4780,1910 3851.57,1910 3826.57,1885 v1(3820,1885) 3822.5,1882.5 4117.5,1882.5 v1(4120,1880) v1(4425,1880) v1(4730,1880)
R4: SW13.3 SW14.3 SW15.3 SW16.3 U1.43 | length 2184.3
  Top Layer w10: SW13.3 3825,2477.09 v1(3825,2375) ; SW14.3 4125,2477.09 v1(4125,2375) ; SW15.3 4425,2482.09 v1(4425,2385) ; SW16.3 4725,2482.09 v1(4725,2390)
  Bottom Layer w10: U1.43 4060.16,2850.86 4054.3,2845 3880.86,2845 3875,2839.14 3875,2425 v1(3825,2375) v1(4125,2375) 4130,2380 4420,2380 v1(4425,2385) 4427.5,2387.5 4722.5,2387.5 v1(4725,2390)
RS: DS1.4 U1.22 | length 1295.6
  Top Layer w10: v1(4280,3485) 4280,3690 4300,3710 4721.99,3710 4775,3656.99 4775,3630 4815,3590 5020.64,3590 5026.5,3595.86 DS1.4
  Bottom Layer w10: U1.22 4139.24,3361.76 4139.24,3409.8 4163.05,3433.6 4168.59,3433.6 4220,3485 v1(4280,3485)
SWCLK: P1.3 U1.11 | length 1692.3
  Top Layer w10: P1.3 3340,2115 3500,2115 3528,2143 3528,3162.54 3652.46,3287 3797,3287 v1(3835,3325)
  Bottom Layer w10: v1(3835,3325) 3835,3319.68 3865.75,3288.93 3908.24,3288.93 U1.11
SWDIO: P1.2 U1.10 | length 1507.6
  Top Layer w10: P1.2 3504.14,2320 3510,2325.86 3510,3170 3665,3325 v1(3770,3325)
  Bottom Layer w10: v1(3770,3325) 3780,3325 3820,3285 3830,3285 3846.1,3268.9 U1.10
USART1_RX: P2.3 U1.31 | length 1800.6
  Top Layer w10: v1(4435,3115) 4770,3115 4812.5,3072.5 4812.5,2982.5 4845,2950 4954.14,2950 4960,2944.14 4960,2360 4980,2340 P2.3
  Bottom Layer w10: U1.31 4231.76,3189.81 4280.19,3189.81 4355,3115 v1(4435,3115)
USART1_TX: P2.2 U1.30 | length 1638.1
  Top Layer w10: v1(4435,3175) 4795,3175 4840,3130 4840,3010 4870,2980 4989.14,2980 4995,2974.14 4995,2570 5010,2555 5270,2555 P2.2
  Bottom Layer w10: U1.30 4286.42,3209.84 4321.26,3175 v1(4435,3175)
VBUS: C3.2 J1.1 U2.3 | length 660.9
  Top Layer w10: C3.2 5319.14,3345 5319.14,3306.65 U2.3 5380.71,3300.79 J1.1
pads on no net: DS1.7 DS1.8 DS1.9 DS1.10 DS1.15 DS1.16 DS1.S1 DS1.S2 DS1.S3 DS1.S4 SW1.4 SW2.4 SW3.4 SW4.4 SW5.4 SW6.4 SW7.4 SW8.4 SW9.4 SW10.4 SW11.4 SW12.4 SW13.2 SW13.4 SW14.2 SW14.4 SW15.2 SW15.4 SW16.2 SW16.4 U1.2 U1.3 U1.4 U1.12 U1.13 U1.14 U1.15 U1.16 U1.17 U1.29 U1.32 U1.33 U1.34 U1.37 U1.38
copper on no net: | length 16145.4
  Top Layer w10: 2395,5125 6039.14,5125 6045,5119.14 6045,725 6039.14,719.14 2420.86,719.14 2410,730 2410,5095 2405,5100 ; 7190,5200 7250,5140

## Polygon pours and split planes (outlines as drawn)
GND on Top Layer "GND_L01_P021" (solid, pour order 21): 2379.57,5152.93 6034.57,5152.93 6034.57,727.93 6020,742.5 2405,742.5 2405,5127.5 2394.57,5137.93
GND on Bottom Layer "GND_L02_P023" (solid, pour order 23): 2390,5135 6060,5135 6060,705 2390,705

## Text inside footprints (layer, text, board x,y; h text height)
P1: Assembly Notes "Stencil thickness : 120 μm" at 3140.08,2423 h39.37 r270
P2: Assembly Notes "Stencil thickness : 120 μm" at 5090.08,2643 h39.37 r270